# EAGLE board PCB 1b (EAGLE 9.0.1)
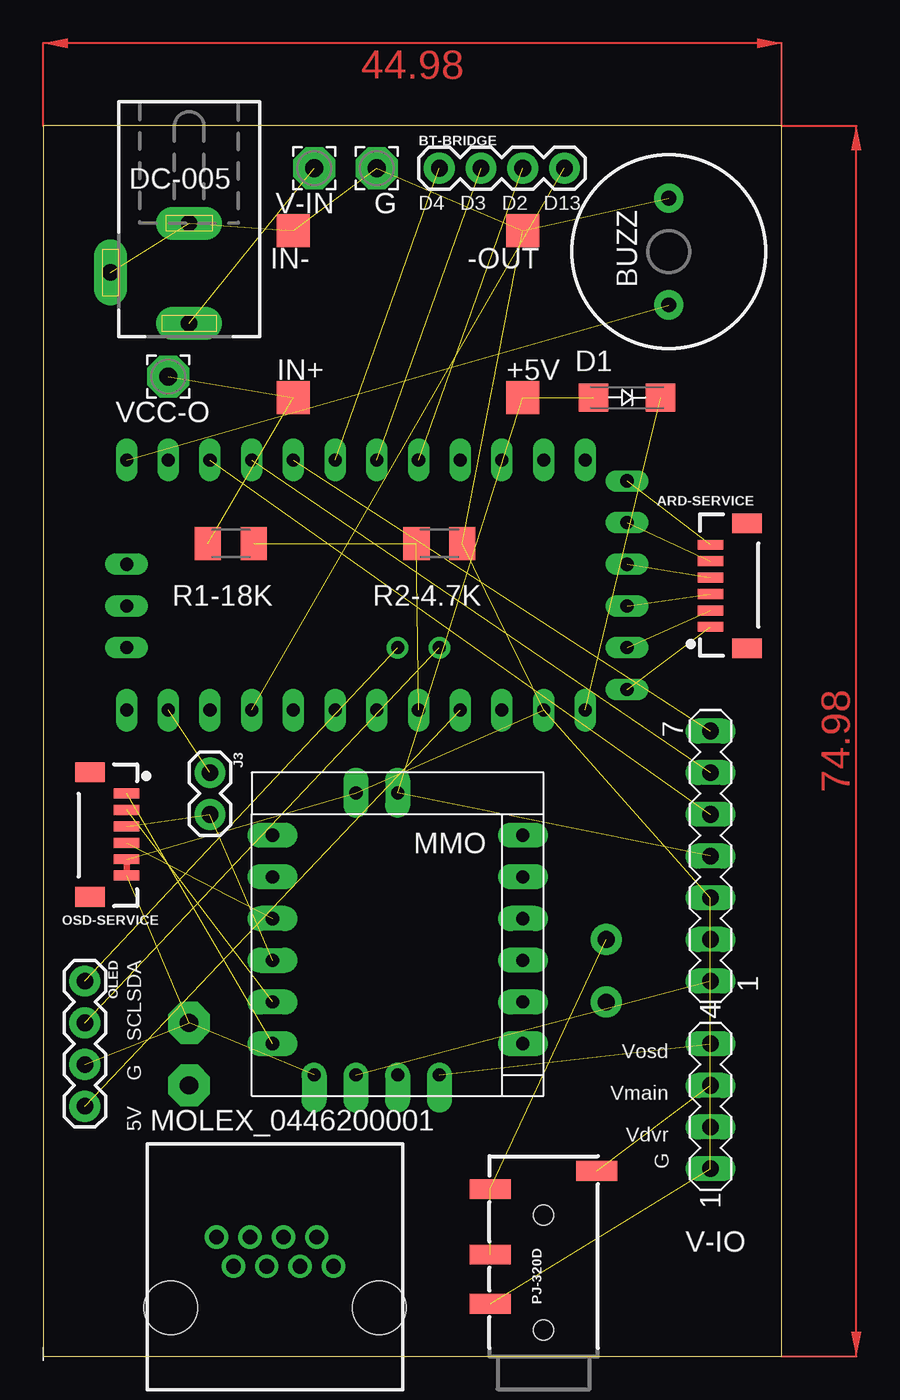
[diagram p0: board, top side]
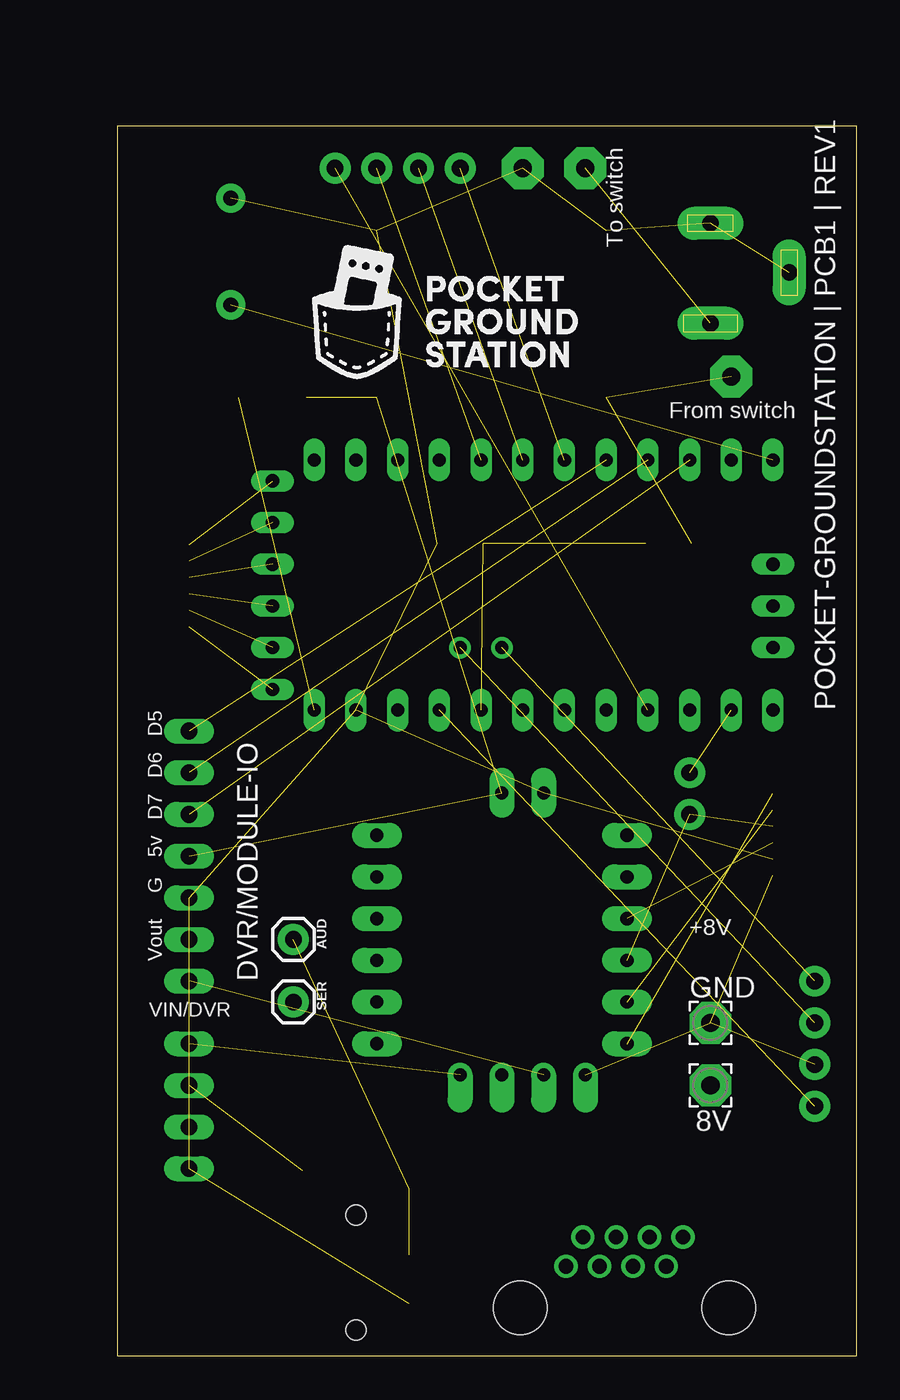
[diagram p1: board, bottom side, seen from below]

Size 44.98 x 74.98 mm. Coordinates in mm from the lower left corner, seen from the top.
Outline: 0,74.98 0,0 44.98,0 44.98,74.98 0,74.98
Copper layers (1*16): Top 0.035mm / dielectric 1.5mm / Bottom 0.035mm
Design rules "PCB Albert *": minimum track width 0.15mm, minimum drill 0.35mm, track to track 0.205mm, track to pad 0.205mm, pad to pad 0.205mm, via to via 0.205mm, smd to smd 6mil, copper to edge 40mil, drill to drill 6mil, minimum pad ring 10mil, minimum via ring 8mil, stop-mask expansion 4mil, vias tented up to drill 0mil, thermal gap 10mil
Net classes: 0 default: width 0.762 mm, drill 0.508 mm, clearance 0.508 mm; 1 thin: width 0.4 mm, drill 0.3 mm, clearance 0.3 mm; 2 medium: width 0.5 mm, drill 0.4 mm, clearance 0.3 mm

## Footprints (pad centres in the part's own frame; a part is rotated, then mirrored left to right if it is on the bottom)
2,54/1,1 = drill 1.118 pad 2.54 octagon: 1 0,0
TP20SQ = smd 2 x 2: TP 0,0
1X06-1MM = smd 0.6 x 1.55: 1 -2.54,1.27; 2 -1.54,1.27; 3 -0.54,1.27; 4 0.46,1.27; 5 1.46,1.27; 6 2.46,1.27 | smd 1.2 x 1.8: P$1 -3.84,-0.955; P$2 3.76,-0.955
1X01 = drill 1.016 pad 1.88: 1 0,0
1X04 = drill 1.016 pad 1.88: 1 0,0; 2 2.54,0; 3 5.08,0; 4 7.62,0
BUZZER-12MM = drill 0.9 pad 1.778: + 3.25,0; - -3.25,0
SMA-DO214AC = smd 1.8 x 1.7: A -2.05,0; K 2.05,0
DCJ0202 = drill 1 pad 2 long: 1 0,3.1; 2 4.8,0; 3 0,-3
MA07-1 = drill 1.016 long: 1 -7.62,0; 2 -5.08,0; 3 -2.54,0; 4 0,0; 5 2.54,0; 6 5.08,0; 7 7.62,0
1X02 = drill 1.016 pad 1.88: 1 0,0; 2 2.54,0
MMOSDNVDVID = drill 0.8 pad 1.524 long: BAT1 -7.62,-3.81; BAT2 -7.62,-1.27; BGND -7.62,-6.35; CGND -7.62,3.81; CUR -7.62,6.35; DTR 7.62,6.35; GND1 7.62,-3.81; GND2 7.62,-6.35; IGND 2.54,-8.93; IVCC 0,-8.93; RSSI -7.62,1.27; RX 7.62,1.27; TX 7.62,3.81; VCC 7.62,-1.27 | drill 0.8 pad 1.524 offset: VGND1 0,8.255; VGND2 5.08,8.255; VIDIN 2.54,8.255; VIDOUT -2.54,8.255
0446200001 = drill 0.889 pad 1.422: 1 3.556,2.54; 2 2.54,4.318; 3 1.524,2.54; 4 0.508,4.318; 5 -0.508,2.54; 6 -1.524,4.318; 7 -2.54,2.54; 8 -3.556,4.318 | hole 3.251: 6.35,0; -6.35,0
AUDIO_JACK_3.5MM_TRRS_SMD_RA = smd 1.2 x 2.5: EARTH 11.3,-3.25; RING1 6.2,3.25; RING2 3.2,3.25; TIP 10.2,3.25 | hole 1.2: 1.6,0; 8.6,0
M1206 = smd 1.6 x 2: 1 -1.4,0; 2 1.4,0
ABK-PRO-MINI = drill 0.8 long: A0 10.16,-3.81; A1 10.16,-6.35; A2 10.16,-8.89; A3 10.16,-11.43; A6 3.81,-21.59; A7 6.35,-21.59; D2 -5.08,-3.81; D3 -5.08,-6.35; D4 -5.08,-8.89; D5 -5.08,-11.43; D6 -5.08,-13.97; D7 -5.08,-16.51; D8 -5.08,-19.05; D9 -5.08,-21.59; D10 10.16,-21.59; D11 10.16,-19.05; D12 10.16,-16.51; D13 10.16,-13.97; DTR 8.89,8.89; GND 10.16,3.81; GND1 -5.08,-1.27; GND2 -3.81,8.89; GND3 -1.27,8.89; GND4 1.27,-21.59; RAW 10.16,6.35; RST 10.16,1.27; RST1 -5.08,1.27; RX1 -5.08,3.81; RX1-1 3.81,8.89; TX0 -5.08,6.35; TX0-1 6.35,8.89; VCC 10.16,-1.27; VCC1 1.27,8.89 | drill 0.8: A4 6.35,-5.08; A5 6.35,-2.54
MA04-1 = drill 1.016 long: 1 -3.81,0; 2 -1.27,0; 3 1.27,0; 4 3.81,0

## Placement (x,y rotation side)
8V  [2,54/1,1]  8.89,16.51 180 bottom
+5V  TPTP20SQ  [TP20SQ]  29.21,58.42 0 top
-OUT  TPTP20SQ  [TP20SQ]  29.21,68.58 180 top
ARD-SERVICE  EM406  [1X06-1MM]  41.91,46.99 90 top
AUD  [1X01]  34.29,25.4 270 bottom
BT-BRIDGE  [1X04]  24.13,72.39 0 top
BUZZ  BUZZER-PTH  [BUZZER-12MM]  38.1,67.31 270 top
D1  GF1  [SMA-DO214AC]  35.56,58.42 0 top
DC-005  DCJ0202  [DCJ0202]  8.89,66.04 180 top
DVR/MODULE-IO  [MA07-1]  40.64,30.48 90 top
G  [2,54/1,1]  20.32,72.39 180 top
GND  [2,54/1,1]  8.89,20.32 0 bottom
IN+  TPTP20SQ  [TP20SQ]  15.24,58.42 0 top
IN-  TPTP20SQ  [TP20SQ]  15.24,68.58 180 top
J3  [1X02]  10.16,35.56 270 top
MINIMOSD  MICROMINIMOSDPWR  [MMOSDNVDVID]  21.59,25.4 180 top
MOLEX_0446200001  0446200001  [0446200001]  14.12,2.95 0 top
OLED  [1X04]  2.54,22.86 270 top
OSD-SERVICE  EM406  [1X06-1MM]  3.81,31.75 270 top
PJ-320D  AUDIO_JACK_TRRSSMD_RA  [AUDIO_JACK_3.5MM_TRRS_SMD_RA]  30.48,0 90 top
R1-18K  18k Ohm  [M1206]  11.43,49.53 180 top
R2-4.7K  4.7 kOhm  [M1206]  24.13,49.53 180 top
SER  [1X01]  34.29,21.59 270 bottom
U$1  ABK-PRO-MINI  [ABK-PRO-MINI]  26.67,49.53 270 top
V-IN  [2,54/1,1]  16.51,72.39 90 top
V-IO  [MA04-1]  40.64,15.24 90 top
VCC-O  [2,54/1,1]  7.62,59.69 90 top

## Library data of the parts
8V G GND V-IN VCC-O = wirepad
+5V -OUT IN+ IN- = testpad
ARD-SERVICE OSD-SERVICE = SparkFun-Connectors; PROD_ID: CONN-08249; SF_ID: GPS-00579
AUD J3 SER = SparkFun-Connectors
BT-BRIDGE OLED = SparkFun-Connectors; PROD_ID: CONN-09696
BUZZ = SparkFun-Electromechanical; PROD_ID: COMP-08253; SF_SKU: COM-07950; SPICEPREFIX: X
D1 = diode
DC-005 = con-jack; OC_FARNELL: unknown; OC_NEWARK: unknown
DVR/MODULE-IO V-IO = con-lstb; OC_FARNELL: unknown; OC_NEWARK: unknown
MINIMOSD = FPVTools
MOLEX_0446200001 = con-molex; MF: MOLEX; OC_FARNELL: unknown
PJ-320D = SparkFun-Connectors; PROD_ID: CONN-10676; SF_ID: PRT-12639
R1-18K R2-4.7K = rcl; SPICEPREFIX: R
U$1 = Arduino-clone

## Nets
+: DC-005.1 V-IN.1
+5V: +5V.TP D1.A DVR/MODULE-IO.4 MINIMOSD.IVCC
+5VFTDI [thin]: MINIMOSD.VCC OSD-SERVICE.4
BAT1: MINIMOSD.BAT1
BAT2: MINIMOSD.BAT2
BGND: MINIMOSD.BGND
CGND: MINIMOSD.CGND
D5 [thin]: DVR/MODULE-IO.7 U$1.D5
D6 [thin]: DVR/MODULE-IO.6 U$1.D6
D7 [thin]: DVR/MODULE-IO.5 U$1.D7
D10RX [thin]: J3.1 U$1.D11
DTR [thin]: MINIMOSD.DTR OSD-SERVICE.1
DVRVIDEO-IN [medium]: DVR/MODULE-IO.2 V-IO.2
GND: -OUT.TP BUZZ.- DC-005.2 DC-005.3 DVR/MODULE-IO.3 G.1 GND.1 IN-.TP MINIMOSD.IGND MINIMOSD.VGND2 OLED.3 OSD-SERVICE.5 OSD-SERVICE.6 PJ-320D.RING2 R2-4.7K.1 U$1.GND V-IO.1
GND1: MINIMOSD.GND1
GND2: MINIMOSD.GND2
GPSTX [thin]: MINIMOSD.TX OSD-SERVICE.2
HP5 [thin]: BT-BRIDGE.3 U$1.D2
HP6 [thin]: BT-BRIDGE.1 U$1.D4
N$1 [thin]: BT-BRIDGE.2 U$1.D3
N$2: OLED.4 U$1.VCC
N$3: AUD.1 PJ-320D.RING1 PJ-320D.TIP
N$4: D1.K U$1.RAW
N$6: PJ-320D.EARTH V-IO.3
N$7 [thin]: BT-BRIDGE.4 U$1.D13
N$10 [thin]: BUZZ.+ U$1.D9
N$12: R1-18K.1 R2-4.7K.2 U$1.A0
N$16 [thin]: ARD-SERVICE.1 U$1.DTR
N$18 [thin]: ARD-SERVICE.2 U$1.TX0-1
N$19 [thin]: ARD-SERVICE.3 U$1.RX1-1
N$20 [thin]: ARD-SERVICE.4 U$1.VCC1
N$21 [thin]: ARD-SERVICE.5 U$1.GND3
N$22 [thin]: ARD-SERVICE.6 U$1.GND2
OSDSIGNAL [medium]: MINIMOSD.VIDOUT V-IO.4
RAWVIDEO_MODULE [medium]: DVR/MODULE-IO.1 MINIMOSD.VIDIN
RX [thin]: J3.2 MINIMOSD.RX OSD-SERVICE.3
SCL [thin]: OLED.2 U$1.A5
SDA [thin]: OLED.1 U$1.A4
VCC: IN+.TP R1-18K.2 VCC-O.1

## Tracks (layer width: path | path; a pad name or v marks a point on that pad's centre or on a via)
+  (1 unrouted)
+5V  (3 unrouted)
+5VFTDI  (1 unrouted)
D5  (1 unrouted)
D6  (1 unrouted)
D7  (1 unrouted)
D10RX  (1 unrouted)
DTR  (1 unrouted)
DVRVIDEO-IN  (1 unrouted)
GND  (15 unrouted)
  Top 0.381: OSD-SERVICE.5 OSD-SERVICE.6
GPSTX  (1 unrouted)
HP5  (1 unrouted)
HP6  (1 unrouted)
N$1  (1 unrouted)
N$2  (1 unrouted)
N$3  (2 unrouted)
N$4  (1 unrouted)
N$6  (1 unrouted)
N$7  (1 unrouted)
N$10  (1 unrouted)
N$12  (2 unrouted)
N$16  (1 unrouted)
N$18  (1 unrouted)
N$19  (1 unrouted)
N$20  (1 unrouted)
N$21  (1 unrouted)
N$22  (1 unrouted)
OSDSIGNAL  (1 unrouted)
RAWVIDEO_MODULE  (1 unrouted)
RX  (2 unrouted)
SCL  (1 unrouted)
SDA  (1 unrouted)
VCC  (2 unrouted)
(copper drawn outside any net)
  shapes: Top area x2

## Text on the board
tNames: D4 | D3 | D2 | D13 | SDA | SCL | Vosd | G | Vmain | 5V | Vdvr | G
bNames: To switch | From switch | POCKET-GROUNDSTATION | PCB1 | REV1 | D5 | D6 | D7 | 5v | G | +8V | Vout | VIN/DVR